# EAGLE board Becca Sap Flow Sensor MOD3 (EAGLE 9.6.2)
REV: B
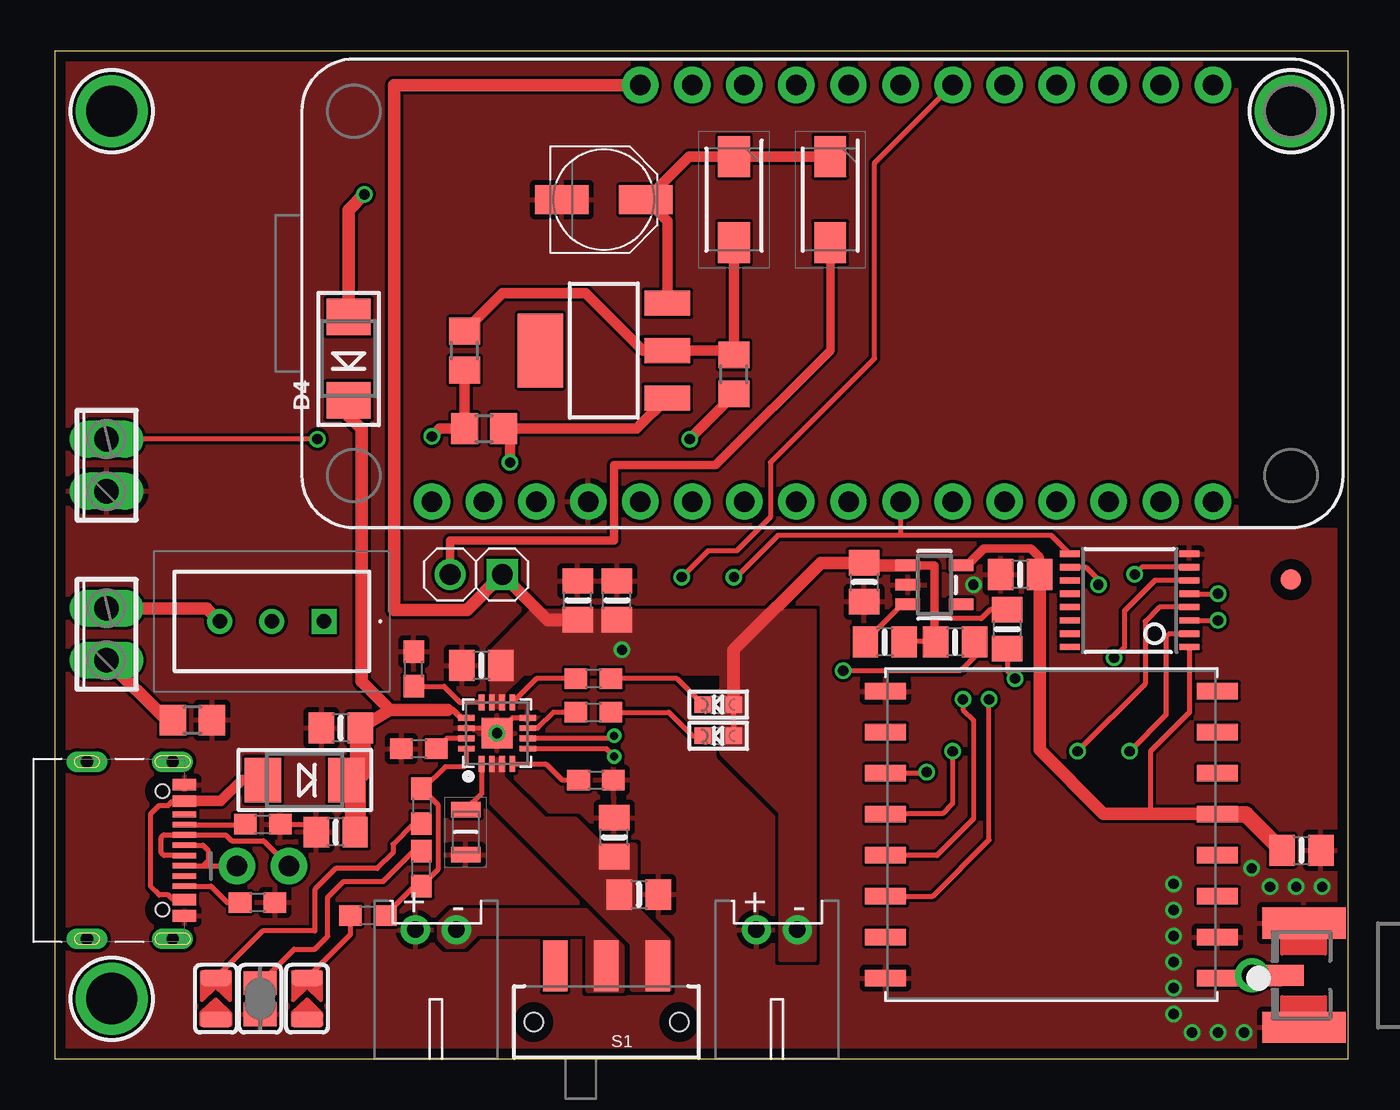
[diagram p0: board, top side]
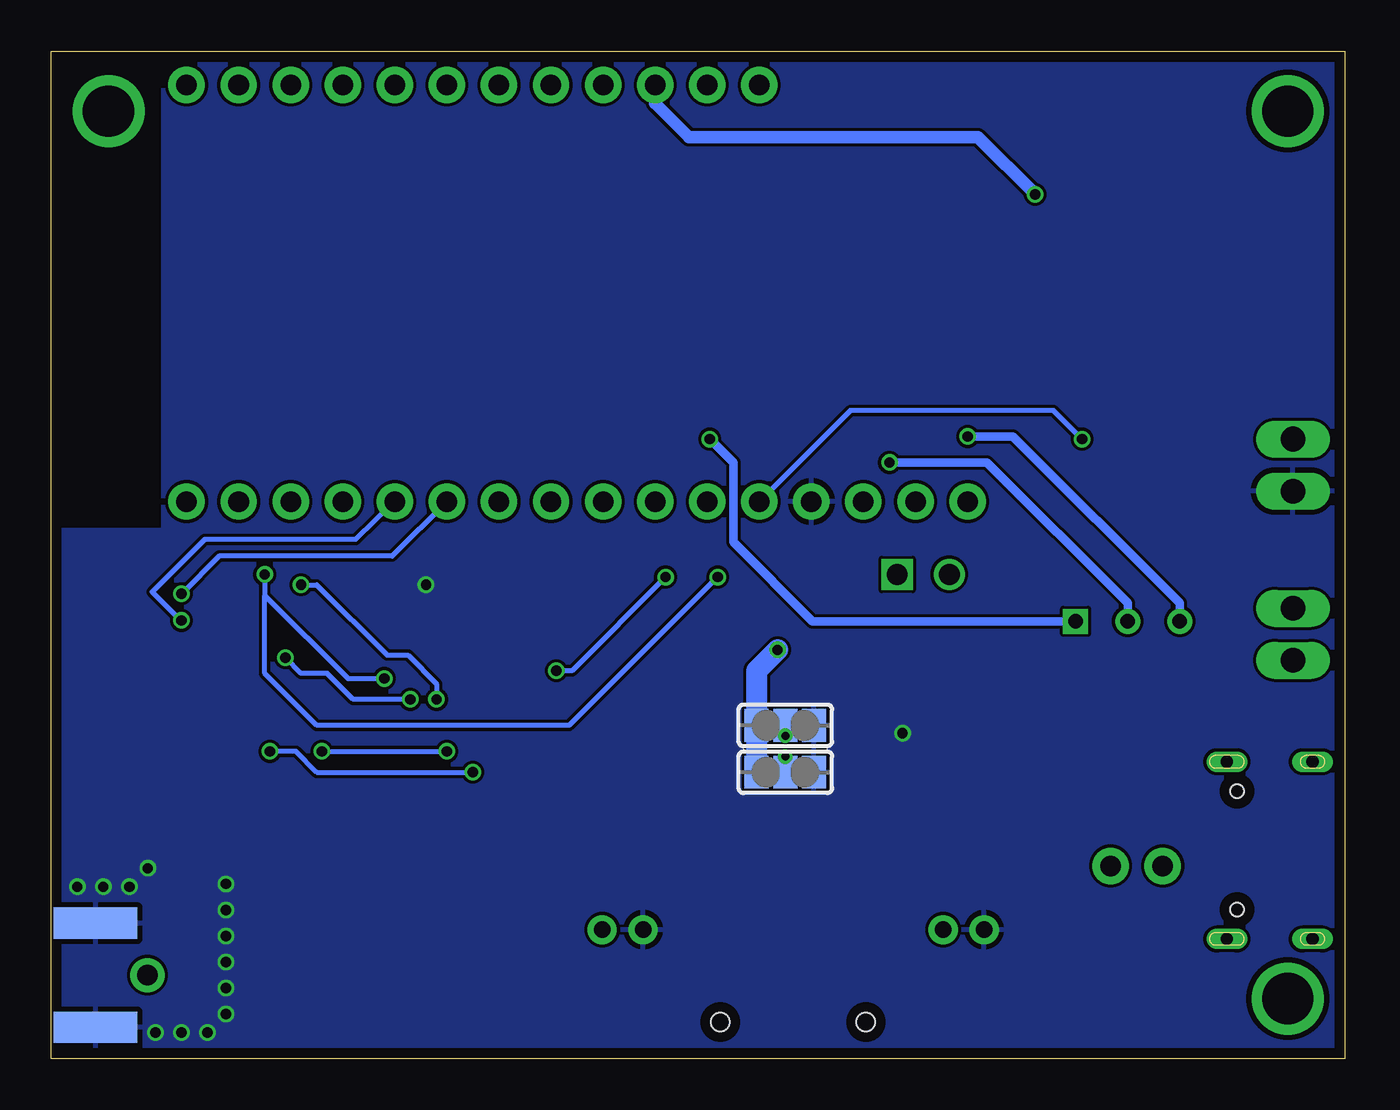
[diagram p1: board, bottom side, seen from below]

Size 63.12 x 49.15 mm. Coordinates in mm from the lower left corner, seen from the top.
Outline: 0,49.15 0,0 63.12,0 63.12,49.15 0,49.15
Copper layers (1*16): Top 0.035mm / dielectric 1.6mm / Bottom 0.035mm
Design rules "Elecrow_2-layer_PCB_eagle_rule": minimum track width 6mil, minimum drill 12mil, track to track 6mil, track to pad 6mil, pad to pad 6mil, via to via 8mil, smd to smd 0mil, copper to edge 20mil, drill to drill 10mil, minimum pad ring 6mil, minimum via ring 6mil, stop-mask expansion 0mil, vias tented up to drill 100mil, thermal gap 10mil
Net classes: 1 highpower: width 0.305 mm, drill 0.483 mm

## Footprints (pad centres in the part's own frame; a part is rotated, then mirrored left to right if it is on the bottom)
SOLDERJUMPER_ARROW_NOPASTE = smd 0.762 x 1.524: 1 -1.016,0; 2 1.016,0
SOLDERJUMPER_CLOSEDWIRE = smd 1.168 x 1.6: 1 -0.762,0; 2 0.762,0 | smd 0.635 x 0.203: WIRE 0,0
JST-PH-2-THM-RA = drill 0.8 pad 1.422: 1 1,0; 2 -1,0
0805-NO = smd 1.24 x 1.5: 1 -0.95,0; 2 0.95,0
PANASONIC_C = smd 2.6 x 1.4: + 2.05,0; - -2.05,0
CHIPLED_0603 = smd 0.8 x 0.8: A 0,-0.75; C 0,0.75
SMADIODE = smd 1.778 x 2.159: A 2.019,0; C -2.045,0
DIOM5027X250N = smd 2 x 1.55: 1 -2.1,0; 2 2.1,0
FIDUCIAL_1MM = smd 1 x 1: 1 0,0
1X02_ROUND = drill 1 pad 1.778: 1 -1.27,0; 2 1.27,0
HDR2X1 = drill 1.016 square: 1 0,0 | drill 1.016: 2 2.54,0
1X01_ROUND = drill 1 pad 1.676: 1 0,0
0603-NO = smd 1.1 x 1: 1 -0.85,0; 2 0.85,0
R0805 = smd 1.3 x 1.5: 1 -0.95,0; 2 0.95,0
THRMC2012X95N = smd 0.75 x 1.45: 1 -1.1,0; 2 1.1,0
SWITCH_SPDT_SMD = smd 1.2 x 2.5: 1 -2.5,-2.75; 2 0,-2.75; 3 2.5,-2.75 | hole 0.9: -3.55,0; 3.55,0
SOLDERJUMPER_2WAY_OPEN_NOPASTE = smd 1.168 x 1.6: 1 -1.397,0; 2 0,0; 3 1.397,0
SOT223 = smd 1.219 x 2.235: 1 -2.311,-3.099; 2 0,-3.099; 3 2.311,-3.099 | smd 3.6 x 2.2: 4 0,3.099
BORON = drill 1 pad 1.778: 1 1.27,44.45; 2 1.27,41.91; 3 1.27,39.37; 4 1.27,36.83; 5 1.27,34.29; 6 1.27,31.75; 7 1.27,29.21; 8 1.27,26.67; 9 1.27,24.13; 10 1.27,21.59; 11 1.27,19.05; 12 1.27,16.51; 13 1.27,13.97; 14 1.27,11.43; 15 1.27,8.89; 16 1.27,6.35; 17 21.59,6.35; 18 21.59,8.89; 19 21.59,11.43; 20 21.59,13.97; 21 21.59,16.51; 22 21.59,19.05; 23 21.59,21.59; 24 21.59,24.13; 25 21.59,26.67; 26 21.59,29.21; 27 21.59,31.75; 28 21.59,34.29
RFMHCW_SMT = smd 2 x 0.8: 1P 8.1,-7; 2P 8.1,-5; 3P 8.1,-3; 4P 8.1,-1; 5P 8.1,1; 6P 8.1,3; 7P 8.1,5; 8P 8.1,7; 9P -8.1,7; 10P -8.1,5; 11P -8.1,3; 12P -8.1,1; 13P -8.1,-1; 14P -8.1,-3; 15P -8.1,-5; 16P -8.1,-7
TSSOP16 = smd 0.305 x 0.991: 1 -2.275,-2.918; 2 -1.625,-2.918; 3 -0.975,-2.918; 4 -0.325,-2.918; 5 0.325,-2.918; 6 0.975,-2.918; 7 1.625,-2.918; 8 2.275,-2.918; 9 2.275,2.918; 10 1.625,2.918; 11 0.975,2.918; 12 0.325,2.918; 13 -0.325,2.918; 14 -0.975,2.918; 15 -1.625,2.918; 16 -2.275,2.918
SOT23-5 = smd 0.55 x 1.2: 1 -0.95,-1.3; 2 0,-1.3; 3 0.95,-1.3; 4 0.95,1.3; 5 -0.95,1.3
MOUNTINGHOLE_2.5_PLATED = drill 2.5 pad 3.2: P$1 0,0
3296W1102RLF = drill 0.71 pad 1.217 square: 1 0,0 | drill 0.71 pad 1.217: 2 0,2.54; 3 0,5.08
2POL254 = drill 1.2 long: 1 -1.27,0; 2 1.27,0
USB_C_CUSB31-CFM2AX-01-X = smd 0.575 x 1.15: A1B12 -3.2,3.545; A4B9 -2.4,3.545; B1A12 3.2,3.545; B4A9 2.4,3.545 | smd 0.275 x 1.15: A5 -1.25,3.545; A6 -0.25,3.545; A7 0.25,3.545; A8 1.25,3.545; B5 1.75,3.545; B6 0.75,3.545; B7 -0.75,3.545; B8 -1.75,3.545 | drill 0.6 pad 1 long: M1 -4.32,2.97; M2 4.32,2.97; M3 -4.32,-1.21; M4 4.32,-1.21 | hole 0.65: 2.89,2.47; -2.89,2.47
QFN16_3MM = smd 0.8 x 0.28: 1 -1.5,0.75; 2 -1.5,0.25; 3 -1.5,-0.25; 4 -1.5,-0.75; 9 1.5,-0.75; 10 1.5,-0.25; 11 1.5,0.25; 12 1.5,0.75 | smd 0.28 x 0.8: 5 -0.75,-1.5; 6 -0.25,-1.5; 7 0.25,-1.5; 8 0.75,-1.5; 13 0.75,1.5; 14 0.25,1.5; 15 -0.25,1.5; 16 -0.75,1.5 | smd 1.5 x 1.5: THERMAL 0,0
SMA_EDGELAUNCH_UFL = smd 4.064 x 1.524: GND@1 2.032,-2.54; GND@2 2.032,2.54 | smd 4.064 x 1.524 bottom: GND@3 2.032,2.54; GND@4 2.032,-2.54 | smd 2.032 x 1.016: P 3.048,0

## Placement (x,y rotation side)
0.5A  [SOLDERJUMPER_ARROW_NOPASTE]  12.32,2.92 90 top
1.5A  [SOLDERJUMPER_ARROW_NOPASTE]  7.87,2.92 90 top
1A  [SOLDERJUMPER_CLOSEDWIRE]  10.03,2.92 90 top
BATT  JST 2PH  [JST-PH-2-THM-RA]  18.61,6.29 180 top
C1  10uF  [0805-NO]  13.72,11.05 180 top
C2  10uF  [0805-NO]  20.83,19.18 180 top
C3  10uF  [0805-NO]  25.53,22.35 90 top
C4  10uF  [0805-NO]  27.43,22.35 90 top
C5  10uF  [0805-NO]  28.51,8 0 top
C6  10uF  [0805-NO]  27.3,10.79 90 top
C7  220u, 25V  [PANASONIC_C]  26.8,41.91 0 top
C8  0.1uF  [0805-NO]  60.83,10.16 0 top
C9  10uF  [0805-NO]  13.97,16.13 180 top
C10  10uF  [0805-NO]  39.5,23.24 270 top
C14  10uF  [0805-NO]  47.12,23.62 180 top
D1  GREEN  [CHIPLED_0603]  32.38,15.75 90 top
D2  SK34A  [SMADIODE]  12.19,13.59 180 top
D3  RED  [CHIPLED_0603]  32.38,17.27 90 top
D4  SK34A  [SMADIODE]  14.35,34.16 90 top
D5  S1A  [DIOM5027X250N]  37.85,41.91 270 top
D6  S1A  [DIOM5027X250N]  33.15,41.91 270 top
FID2  FIDUCIAL_1MM  [FIDUCIAL_1MM]  60.33,23.37 0 top
JP1  [1X02_ROUND]  10.16,9.4 0 top
JP3  JUMPER  [HDR2X1]  21.84,23.62 180 top
JP7  [1X01_ROUND]  58.42,4.06 270 top
R1  1K  [0603-NO]  17.53,19.01 90 top
R2  10K  [0603-NO]  17.78,15.11 180 top
R3  590  [0603-NO]  17.91,12.32 270 top
R4  5.1K  [0603-NO]  9.91,7.62 180 top
R5  2K  [0603-NO]  15.28,6.99 180 top
R6  5.1K  [0603-NO]  10.16,11.43 180 top
R7  10K  [0603-NO]  26.29,18.54 0 top
R8  10K  [0603-NO]  26.42,13.59 0 top
R9  1K  [0603-NO]  17.91,9.27 90 top
R10  12 Ohm, 5%  [R0805]  20,34.54 90 top
R11  10K  [0603-NO]  26.29,16.89 0 top
R12  47 Ohm, 5%  [R0805]  33.15,33.39 90 top
R13  100 Ohm, 5%  [R0805]  20.95,30.73 0 top
R14  R of 2 Thermos  [R0805]  6.73,16.51 180 top
R15  100K  [0805-NO]  40.51,20.32 180 top
R16  100K  [0805-NO]  43.94,20.32 180 top
R17  100K  [0805-NO]  46.48,20.95 90 top
RT1  NTCS0805E3103FHT  [THRMC2012X95N]  20.07,11.05 270 top
S1  [SWITCH_SPDT_SMD]  26.92,1.78 180 top
SJ1  [SOLDERJUMPER_2WAY_OPEN_NOPASTE]  27.3,13.97 0 bottom
SJ2  [SOLDERJUMPER_2WAY_OPEN_NOPASTE]  27.3,16.26 0 bottom
SYSOUT  JST 2PH  [JST-PH-2-THM-RA]  35.24,6.29 180 top
U1  V_REG_317SMD  [SOT223]  26.8,34.54 90 top
U2  BORON  [BORON]  62.87,25.91 90 top
U6  RFM69HCW  [RFMHCW_SMT]  48.64,10.92 0 top
U7  74HC4050D  [TSSOP16]  52.45,22.35 90 top
U8  AP2112K-3.3  [SOT23-5]  42.93,23.11 270 top
U$3  MOUNTINGHOLE2.5  [MOUNTINGHOLE_2.5_PLATED]  2.79,2.92 0 top
U$4  MOUNTINGHOLE2.5  [MOUNTINGHOLE_2.5_PLATED]  2.79,46.23 0 top
U$11  MOUNTINGHOLE2.5  [MOUNTINGHOLE_2.5_PLATED]  60.33,46.23 0 top
VR1  3296W-1-102RLF  [3296W1102RLF]  13.14,21.34 90 top
X1  [2POL254]  2.54,20.7 90 top
X2  USB Type C  [USB_C_CUSB31-CFM2AX-01-X]  2.79,10.16 270 top
X3  [2POL254]  2.54,28.96 90 top
X4  BQ24074  [QFN16_3MM]  21.59,15.88 90 top
X5  uFL/SMA  [SMA_EDGELAUNCH_UFL]  62.99,4.06 180 top

## Library data of the parts
0.5A 1.5A FID2 U$3 U$4 U$11 = microbuilder; BOM: EXCLUDE
1A C1-C6 C8-C10 C14 D1-D4 JP1 JP7 R1-R9 R11 R15-R17 SJ1 SJ2 U6-U8 X2 X5 = microbuilder
BATT SYSOUT = adafruit
C7 = rcl; SPICEPREFIX: C
D5 D6 = S1A; DESCRIPTION: Rectifier Diode Switching 50V 1A 1500ns 2-Pin SMA T/R; HEIGHT: 2.5mm; MANUFACTURER_NAME: Diotec; MANUFACTURER_PART_NUMBER: S1A; MOUSER_PART_NUMBER: 637-S1A; MOUSER_PRICE-STOCK: https://www.mouser.co.uk/ProductDetail/Diotec-Semiconductor/S1A?qs=OlC7AqGiEDlqVjQP70PTqA%3D%3D
JP3 = 6P1_EVB
R10 R12-R14 = rcl; SPICEPREFIX: R
RT1 = NTCS0805E3103FHT; DESCRIPTION: NTC Thermistors NTC 10Kohms 1%; HEIGHT: 0.95mm; MANUFACTURER_NAME: Vishay; MANUFACTURER_PART_NUMBER: NTCS0805E3103FHT; MOUSER_PART_NUMBER: 594-NTCS0805E3103FHT; MOUSER_PRICE-STOCK: https://www.mouser.co.uk/ProductDetail/Vishay-BC-Components/NTCS0805E3103FHT?qs=%2FWiulJ9oly74KIuevFiaAw%3D%3D
S1 = SparkFun-Retired
U1 = SparkFun-IC-Power
U2 = Particle-Devices
VR1 = 3296W-1-102RLF; DESCRIPTION: 1 kOhms 0.5W, 1/2W PC Pins Through Hole Trimmer Potentiometer Cermet 25.0 Turn Top Adjustment; HEIGHT: 11.8mm; MANUFACTURER_NAME: Bourns; MANUFACTURER_PART_NUMBER: 3296W-1-102RLF; MOUSER_PART_NUMBER: 652-3296W-1-102RLF; MOUSER_PRICE-STOCK: https://www.mouser.co.uk/ProductDetail/Bourns/3296W-1-102RLF?qs=oM%2FE6%2FUWOpR5bwX1MfrWeA%3D%3D
X1 X3 = con-phoenix-254; OC_FARNELL: unknown; OC_NEWARK: unknown
X4 = adafruit_power

## Nets
3.3V: C8.1 C14.1 U6.5P U7.1 U8.5
3V3: U2.2
!CE: R8.1 X4.4
!CHG: R7.1 X4.9
!PGOOD: R11.1 X4.7
CC1: R6.2 X2.A5
CC2: R4.2 X2.B5
CS_3V1: U6.13P U7.10
CS_5V1: R16.1 U2.10 U7.9
D+: JP1.1 X2.A6 X2.B6
D-: JP1.2 X2.A7 X2.B7
DIO6: U6.3P
DIO7: U6.6P
DIO8: U6.8P
DIO9: U6.7P
DIO10: U6.15P
DIO11: U6.4P
EN1: SJ2.2 X4.6
EN2: SJ1.2 X4.5
EN3: R15.2 U8.3
GND: 0.5A.1 1.5A.1 1A.1 BATT.1 C1.2 C2.2 C3.2 C4.2 C5.2 C6.2 C7.- C8.2 C9.2 C10.2 C14.2 R1.2 R2.2 R4.1 R6.1 R8.2 R14.1 RT1.2 SJ1.3 SJ2.3 SYSOUT.1 U2.4 U6.2P U6.9P U6.16P U7.8 U8.2 X2.A1B12 X2.B1A12 X3.1 X4.8 X4.14 X4.THERMAL X5.GND@1 X5.GND@2 X5.GND@3 X5.GND@4
ILIM: R1.1 X4.12
ISET: R3.1 R5.1 R9.1 X4.16
ITERM: R2.1 X4.15
MISO_3V1: U6.10P
MISO_5V1: U2.13
MOSI_3V1: U6.11P U7.2
MOSI_5V1: U2.12 U7.3
N$1: D1.C R11.2
N$2: BATT.2 S1.2
N$3: D3.C R7.2
N$5: 1.5A.2 R3.2
N$6: 0.5A.2 R5.2
N$7: 1A.2 R9.2
N$9: RT1.1 X4.1
N$10: D5.2 JP3.2
N$11: C7.+ D5.1 D6.1 U1.3
N$12: D6.2 R10.2 R12.2 U1.2
N$13: R14.2 X1.1
N$14: R13.2 U1.1 VR1.2
N$15: R12.1 VR1.1
N$16: R10.1 R13.1 VR1.3 X1.2
N$17: U2.5 X3.2
N$18: JP7.1 U6.1P X5.P
OUT: C2.1 C3.1 C4.1 C10.1 D1.A D3.A JP3.1 R15.1 R16.2 R17.2 SJ1.1 SJ2.1 SYSOUT.2 U2.28 U8.1 X4.10 X4.11
RST_3V1: U6.14P U7.6
RST_5V1: R17.1 U2.22 U7.7
SCK_3V1: U6.12P U7.4
SCK_5V1: U2.11 U7.5
VBUS: C1.1 C9.1 D2.C D4.C X4.13
VLIPO: C5.1 C6.1 S1.1 X4.2 X4.3
VUSB: D2.A X2.A4B9 X2.B4A9
VUSB1: D4.A U2.26

## Tracks (layer width: path | path; a pad name or v marks a point on that pad's centre or on a via)
3.3V
  Top 0.254: U7.1 55.37,16.89 53.47,14.99 53.47,11.94
  Top 0.406: U8.5 44.51,24.06 45.34,24.89 47.62,24.89 48.07,24.45 C14.1
  Top 0.61: U6.5P 56.73,11.94 53.47,11.94 51.18,11.94 48.07,15.05 C14.1
  Top 0.813: U6.5P 58.12,11.92 C8.1
!CE
  Top 0.254: X4.4 23.37,14.38 23.98,14.38 24.77,13.59 R8.1
!CHG
  Top 0.254: R7.1 23.51,18.54 X4.9
!PGOOD
  Top 0.254: X4.7 23.57,16.12 24.34,16.89 R11.1
CC1
  Top 0.254: X2.A5 9.29,11.41 R6.2
CC2
  Top 0.254: X2.B5 7.63,8.41 8.42,7.62 R4.2
CS_3V1  (via drill 0.5)
  Top 0.254: U7.10 50.32,23.98 50.93,23.37 v50.93,23.11 | v44.32,17.53 44.32,17.02 44.83,16.51 44.83,11.68 43.05,9.91 40.56,9.91 U6.13P
  Bottom 0.254: v50.93,23.11 50.16,23.11 46.74,19.68 45.72,19.68 44.32,18.29 v44.32,17.53
CS_5V1  (via drill 0.5)
  Top 0.254: U7.9 48.63,25.53 41.27,25.53 | 41.27,25.53 35.31,25.53 33.27,23.5 v33.15,23.5 | R16.1 44.89,19.62 44.2,18.92 v38.48,18.92 | U2.10 41.27,25.53
  Bottom 0.254: v33.15,23.5 37.72,18.92 v38.48,18.92
D+
  Top 0.254: X2.A6 7.24,10.41 7.49,10.16 7.49,9.65 7.25,9.41 | X2.B6 7.25,9.41 | 7.25,9.41 8.88,9.41 JP1.1
D-
  Top 0.254: X2.A7 5.33,9.91 5.21,10.03 5.21,10.79 5.33,10.92 6.33,10.92 X2.B7 8.36,10.91 8.65,10.62 10.2,10.62 JP1.2
EN1  (via drill 0.39)
  Top 0.254: X4.6 27.18,15.62 v27.3,15.75
  Bottom 0.254: SJ2.2 v27.3,15.75
EN2  (via drill 0.39)
  Top 0.254: X4.5 26.91,15.12 v27.3,14.73
  Bottom 0.254: SJ1.2 v27.3,14.73
EN3
  Top 0.254: R15.2 39.56,20.39 41.34,22.16 U8.3
GND  (via drill 0.5)
  Top 0.254: X4.8 22.34,16.62 X4.THERMAL 21.34,16.12 X4.14 | R6.1 12.38,11.43 C1.2
  Top 0.406: U8.2 41.53,23.11
  other vias: 44.83,23.11 54.6,7.25 58.41,9.28 60.58,8.38 61.85,8.38 54.6,5.98 54.6,8.52 58.04,1.27 56.77,1.27 55.5,1.27 54.6,2.17 54.6,3.44 54.6,4.71 59.31,8.38 21.59,15.88
  pour Bottom (rank 3): 0,0 63.12,0 63.12,49.15 0,49.15
  pour Top (rank 3): 0,0 63.12,0 63.12,49.15 0,49.15
ILIM
  Top 0.254: X4.12 19.8,17.38 19.01,18.16 R1.1
ISET
  Top 0.254: X4.16 20.09,14.36 19.96,14.24 19.07,14.24 18.01,13.17 R3.1 18.71,12.36 18.71,9.23 R9.1 17.56,8.42 R5.1
ITERM
  Top 0.254: X4.15 19.14,15.62 R2.1
MOSI_3V1  (via drill 0.5)
  Top 0.254: U7.2 54.38,20.73 54.23,20.57 54.23,16.76 v52.45,14.99 | v42.55,13.97 42.5,13.92 U6.11P
  Bottom 0.254: v42.55,13.97 50.16,13.97 51.18,14.99 v52.45,14.99
MOSI_5V1  (via drill 0.5)
  Top 0.254: U7.3 v56.76,21.38
  Bottom 0.254: U2.12 48.26,25.34 55.63,25.34 58.2,22.77 56.81,21.38 v56.76,21.38
N$1
  Top 0.254: R11.2 29.97,16.89 31.11,15.75 D1.C
N$2
  pour Top (no thermals): 19.94,5.46 19.18,5.46 18.8,5.84 18.8,6.6 19.43,7.24 25.91,7.24 27.69,5.46 27.69,3.3 26.04,3.3 26.04,6.1 20.57,6.1
N$3
  Top 0.254: D3.C 30.36,18.54 R7.2
N$4
  Bottom 0.254: 27.56,13.97 28.45,13.97
N$5
  Top 0.254: R3.2 17.52,11.47 16.51,10.46 16.51,10.03 15.75,9.27 13.72,9.27 12.7,8.26 12.7,6.22 10.16,6.22 1.5A.2
N$6
  Top 0.254: R5.2 14.43,6.05 0.5A.2
N$7
  Top 0.254: R9.2 17.53,10.12 16.04,8.64 14.1,8.64 13.34,7.87 13.34,5.97 12.7,5.33 11.68,5.33 1A.2
N$8
  Bottom 0.254: 27.05,16.26 26.16,16.26
N$9
  Top 0.254: X4.1 20.84,12.92 RT1.1
N$10
  Top 0.406: D5.2 37.85,34.54 32.26,28.96 27.3,28.96 27.3,25.27 19.3,25.27 JP3.2
N$11
  Top 0.508: D5.1 D6.1 30.95,44.01 C7.+ 29.9,40.86 U1.3
N$12
  Top 0.508: R10.2 21.85,37.34 25.91,37.34 28.7,34.54 U1.2 32.94,34.54 R12.2 D6.2
N$13
  Top 0.61: X1.1 5.46,16.51 R14.2
N$14  (via drill 0.5)
  Top 0.508: v22.23,29.08 22.23,30.41 R13.2 28.4,30.73 U1.1
  Bottom 0.406: v22.23,29.08 17.46,29.08 10.6,22.23 VR1.2
N$15  (via drill 0.5)
  Top 0.508: R12.1 33.15,32.38 v30.99,30.23
  Bottom 0.406: VR1.1 25.97,21.34 29.84,25.21 29.84,29.08 v30.99,30.23
N$16  (via drill 0.5)
  Top 0.508: R10.1 R13.1 18.8,30.73 v18.41,30.35
  Top 0.61: X1.2 7.43,21.97 VR1.3
  Bottom 0.406: v18.41,30.35 16.19,30.35 8.06,22.23 VR1.3
N$17  (via drill 0.5)
  Top 0.254: v12.83,30.23 X3.2
  Bottom 0.254: U2.5 24.13,31.62 14.22,31.62 v12.83,30.23
N$18
  Top 0.406: JP7.1 X5.P
  Top 0.813: U6.1P 59.8,3.92 X5.P
OUT  (via drill 0.5)
  Top 0.254: D3.A D1.A | 42.93,21.59 43.05,21.46 45.21,21.46 45.65,21.91 R17.2 | R15.1 41.53,20.39 42.93,20.39
  Top 0.406: R16.2 42.93,20.39 42.93,21.59 42.93,24.06 U8.1
  Top 0.61: U8.1 39.62,24.06 C10.1 37.4,24.19 33.13,19.93 D3.A | C3.1 24.06,21.4 JP3.1 20.12,21.89 16.56,21.89 16.56,47.5 U2.28
  Bottom 0.254: SJ1.1 28.7,14.86
  Bottom 1.016: v27.69,19.94 28.7,18.92 SJ2.1 28.7,14.86
  pour Top (no thermals): 21.84,17.14 21.34,17.14 21.34,19.87 23.31,21.84 37.05,21.84 37.05,4.83 35.43,4.83 35.43,12.03 32.58,14.89 32.58,18.8 22.86,18.8 21.84,17.78
RST_3V1  (via drill 0.5)
  Top 0.254: U6.14P 42.85,7.92 45.59,10.67 v45.59,17.53 | U7.6 53.68,23.33 52.2,21.84 52.2,20.07 v51.69,19.56
  Bottom 0.254: v45.59,17.53 48.39,17.53 49.66,18.8 50.93,18.8 v51.69,19.56
RST_5V1  (via drill 0.5)
  Top 0.254: U7.7 53.06,23.98 v52.7,23.62 | R17.1 46.48,18.92 v46.86,18.54 | U2.22 40.01,43.69 40.01,34.16 34.92,29.08 34.92,26.42 33.27,24.77 31.88,24.77 v30.61,23.5
  Bottom 0.254: v52.7,23.62 52.7,22.61 | 52.7,22.61 48.64,18.54 v46.86,18.54 | v30.61,23.5 37.85,16.26 50.16,16.26 52.7,18.8 52.7,22.61
SCK_3V1  (via drill 0.5)
  Top 0.254: U7.4 53.9,22.03 53.21,21.34 53.21,18.29 v49.91,14.99 | v43.81,14.99 43.81,12.45 43.31,11.94 40.56,11.94 U6.12P
  Bottom 0.254: v49.91,14.99 v43.81,14.99
SCK_5V1  (via drill 0.5)
  Top 0.254: U7.5 v56.76,22.68
  Bottom 0.254: U2.11 46.48,24.51 54.93,24.51 v56.76,22.68
VBUS
  Top 0.305: 19.18,17.02 19.44,17.02 19.84,16.62 X4.13
  Top 0.61: C9.1 16.37,17.02 | 16.37,17.02 19.18,17.02 | 16.37,17.02 14.99,18.4 14.99,30.72 14.35,31.36 D4.C
  Top 1.016: C9.1 14.92,13.97 D2.C 14.67,13.46 C1.1
VLIPO
  pour Top (no thermals): 21.34,14.61 21.84,14.61 21.84,13.72 23.88,11.68 25.4,11.68 26.67,10.41 28.32,10.41 28.32,7.37 29.97,5.71 29.97,3.37 28.19,3.37 28.19,5.59 21.34,12.45
VUSB
  Top 0.254: X2.B4A9 5.77,7.76 5.56,7.98 5.11,7.98 4.7,8.38 4.7,11.94 5.11,12.34 5.56,12.34 5.77,12.56 X2.A4B9
  Top 0.508: X2.A4B9 8.12,12.56 9.14,13.59 D2.A
VUSB1  (via drill 0.5)
  Top 0.61: v15.11,42.16 14.35,41.4 D4.A
  Bottom 0.61: v15.11,42.16 17.91,44.96 32,44.96 33.66,46.61 U2.26